# EAGLE board Battery Buddy V1 Board (NO STORAGE) (EAGLE 9.7.0)
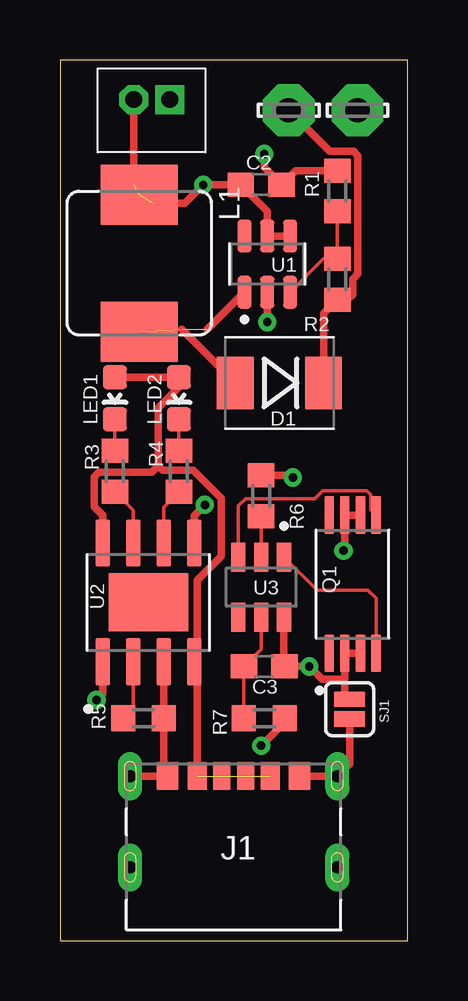
[diagram p0: board, top side]
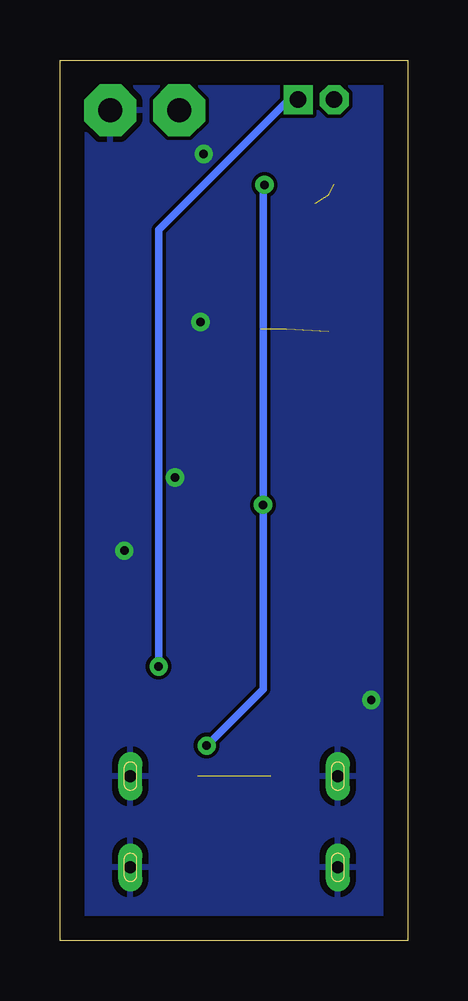
[diagram p1: board, bottom side, seen from below]

Size 14.49 x 36.7 mm. Coordinates in mm from the lower left corner, seen from the top.
Outline: 0,0 14.49,0 14.49,36.7 0,36.7 0,0
Copper layers (1*16): Top 0.035mm / dielectric 1.5mm / Bottom 0.035mm
Design rules "Fusion Electronics Design Rules": minimum track width 6mil, minimum drill 0.35mm, track to track 6mil, track to pad 6mil, pad to pad 6mil, via to via 6mil, smd to smd 6mil, copper to edge 40mil, drill to drill 6mil, minimum pad ring 10mil, minimum via ring 8mil, stop-mask expansion 4mil, vias tented up to drill 9999mil, thermal gap 10mil
Net classes: 1 POWER: width 0.305 mm

## Footprints (pad centres in the part's own frame; a part is rotated, then mirrored left to right if it is on the bottom)
C0603 = smd 1.1 x 1: 1 -0.85,0; 2 0.85,0
DO-214AA = smd 1.524 x 2.184: A 1.841,0; C -1.841,0
CUI_UJC-HP-3-SMT-TR = smd 0.7 x 1.15: A5 -0.5,0.005; B5 0.5,0.005 | smd 0.8 x 1.15: A9 1.52,0.005; B9 -1.52,0.005 | smd 0.9 x 1.15: A12 2.75,0.005; B12 -2.75,0.005 | drill 0.5 pad 1 long: S1 -4.32,0; S2 4.32,0; S3 -4.32,-3.8; S4 4.32,-3.8
INDUCTOR_L0630 = smd 2.5 x 3.2: 1 -2.85,0; 2 2.85,0
0603-GREEN = smd 1 x 1: A 0,-0.877; C 0,0.877
0603-RED = smd 1 x 1: A 0,-0.877; C 0,0.877
LSP10 = drill 1.016 pad 2.159 octagon: MP 0,0
SOP65P640X120-8N = smd 1.56 x 0.4: 1 -2.88,0.975; 2 -2.88,0.325; 3 -2.88,-0.325; 4 -2.88,-0.975; 5 2.88,-0.975; 6 2.88,-0.325; 7 2.88,0.325; 8 2.88,0.975
R0603 = smd 1 x 1.1: 1 -0.85,0; 2 0.85,0
SJ_2S = smd 0.635 x 1.27: 1 -0.412,0; 2 0.412,0
SOT95P280X145-6N = smd 1.37 x 0.59: 1 -1.17,0.95; 2 -1.17,0; 3 -1.17,-0.95; 4 1.17,-0.95; 5 1.17,0; 6 1.17,0.95
SOP127P600X175-9N = smd 1.97 x 0.6: 1 -2.475,1.905; 2 -2.475,0.635; 3 -2.475,-0.635; 4 -2.475,-1.905; 5 2.475,-1.905; 6 2.475,-0.635; 7 2.475,0.635; 8 2.475,1.905 | smd 2.413 x 3.302: 9 0,0
SOT95P280X145-6N' = smd 1.21 x 0.59: 1 -1.255,0.95; 2 -1.255,0; 3 -1.255,-0.95; 4 1.255,-0.95; 5 1.255,0; 6 1.255,0.95
JST-ZH-2P = drill 0.7 square: P$1 0,0 | drill 0.7 octagon: P$2 1.5,0

## Placement (x,y rotation side)
C2  [C0603]  8.38,31.5 0 top
C3  100n  [C0603]  8.51,11.43 180 top
D1  [DO-214AA]  9.14,23.24 180 top
J1  USB-C-SMT-TR  [CUI_UJC-HP-3-SMT-TR]  7.24,6.86 0 top
L1  [INDUCTOR_L0630]  3.3,28.24 270 top
LED1  LED-GREEN0603  [0603-GREEN]  2.29,22.61 180 top
LED2  LED-RED0603  [0603-RED]  4.95,22.61 180 top
LSP3  LSP10  [LSP10]  12.4,34.6 0 top
LSP4  LSP10  [LSP10]  9.53,34.6 0 top
Q1  FS8205A  [SOP65P640X120-8N]  12.19,14.86 90 top
R1  100k  [R0603]  11.56,31.24 270 top
R2  900k  [R0603]  11.56,27.56 270 top
R3  1k  [R0603]  2.29,19.56 270 top
R4  1k  [R0603]  4.95,19.56 270 top
R5  1.2k  [R0603]  3.48,9.27 0 top
R6  1k  [R0603]  8.38,18.54 90 top
R7  100  [R0603]  8.51,9.27 180 top
SJ1  SOLDERJUMPERNC  [SJ_2S]  12.06,9.65 90 top
U1  MT3608  [SOT95P280X145-6N]  8.64,28.19 90 top
U2  TP4056  [SOP127P600X175-9N]  3.68,14.1 90 top
U3  DW01A  [SOT95P280X145-6N']  8.38,14.73 270 top
U$1  JST-ZH-2P  [JST-ZH-2P]  4.57,35.05 180 top

## Library data of the parts
C2 C3 = rcl; SPICEPREFIX: C
D1 L1 LED1 LED2 = BeagleBone_Blue_R3
J1 = USB-C-SMT-TR; AVAILABILITY: In Stock; CHECK_PRICES: https://www.snapeda.com/parts/UJC-HP-3-SMT-TR/Same+Sky/view-part/?ref=eda; DESCRIPTION: Type C, 20 Vdc, 3 A, Right Angle, Surface Mount, Black Insulator, Power-Only USB Receptacle; MF: Same Sky; MP: UJC-HP-3-SMT-TR; PACKAGE: Package; PRICE: None; SNAPEDA_LINK: https://www.snapeda.com/parts/UJC-HP-3-SMT-TR/Same+Sky/view-part/?ref=snap
LSP3 LSP4 = solpad
Q1 = FS8205A; AVAILABILITY: In Stock; CHECK_PRICES: https://www.snapeda.com/parts/FS8205A/Fortune+Semiconductor/view-part/?ref=eda; MF: Fortune Semiconductor; MP: FS8205A; PACKAGE: Package; PRICE: None; SNAPEDA_LINK: https://www.snapeda.com/parts/FS8205A/Fortune+Semiconductor/view-part/?ref=snap
R1-R7 = rcl; SPICEPREFIX: R
SJ1 = SparkFun-Retired
U1 = MT3608; AVAILABILITY: Not in stock; CHECK_PRICES: https://www.snapeda.com/parts/MT3608/Aerosemi+Technology+Co.%252C+Ltd/view-part/?ref=eda; DESCRIPTION: High Efficiency 1.2MHz 2A Step Up Converter; MF: Aerosemi Technology Co., Ltd; MP: MT3608; PACKAGE: Package; PRICE: None; SNAPEDA_LINK: https://www.snapeda.com/parts/MT3608/Aerosemi+Technology+Co.%252C+Ltd/view-part/?ref=snap
U2 = TP4056; AVAILABILITY: Not in stock; CHECK_PRICES: https://www.snapeda.com/parts/TP4056/NanJing+Top+Power+ASIC+Corp./view-part/?ref=eda; DESCRIPTION: Complete single cell Li-Ion battery with a constant current / constant voltage linear charger; MF: NanJing Top Power ASIC Corp.; MP: TP4056; PACKAGE: Package; PRICE: None; SNAPEDA_LINK: https://www.snapeda.com/parts/TP4056/NanJing+Top+Power+ASIC+Corp./view-part/?ref=snap
U3 = DW01A; AVAILABILITY: Not in stock; CHECK_PRICES: https://www.snapeda.com/parts/DW01A/Fortune+Semiconductor/view-part/?ref=eda; DESCRIPTION: One Cell Lithium-ion/Polymer Battery Protection IC; MF: Fortune Semiconductor; MP: DW01A; PACKAGE: SOT-23-6 Fortune Semiconductor; PRICE: None; SNAPEDA_LINK: https://www.snapeda.com/parts/DW01A/Fortune+Semiconductor/view-part/?ref=snap
U$1 = JST-ZH

## Nets
+6V [POWER]: D1.C LSP4.MP R2.2
BATN [POWER]: C3.1 Q1.2 Q1.3 SJ1.2 U3.6 U$1.P$1
BATP [POWER]: C2.1 L1.1 R7.1 U1.4 U1.5 U2.5 U$1.P$2
CHRG: R3.2 U2.7
GND [POWER]: C2.2 J1.A12 J1.B12 J1.S1 J1.S2 J1.S3 J1.S4 LSP3.MP Q1.6 Q1.7 R1.1 R5.2 R6.2 SJ1.1 U1.2 U2.1 U2.3
N$1: LED1.C R3.1
N$2: LED2.C R4.1
N$3: R5.1 U2.2
N$4: R6.1 U3.2
N$5: Q1.4 U3.1
N$6: Q1.5 U3.3
N$7: C3.2 R7.2 U3.5
N$8 [POWER]: D1.A L1.2 U1.1
N$9: R1.2 R2.1 U1.3
STDBY: R4.2 U2.6
USB [POWER]: J1.A9 J1.B9 LED1.A LED2.A U2.4 U2.8

## Tracks (layer width: path | path; a pad name or v marks a point on that pad's centre or on a via)
+6V
  Top 0.305: 11.56,26.93 R2.2 | LSP4.MP 11.23,32.9 12.23,32.9 12.41,32.72 12.41,27.78 12.19,27.56 12.19,26.92 11.98,26.71 R2.2 | D1.C 10.99,26.14 R2.2
BATN  (via drill 0.35)
  Top 0.305: Q1.3 Q1.2 11.87,10.79 | SJ1.2 11.87,10.26 11.87,10.79 | U3.6 9.33,11.46 C3.1 v10.38,11.43 10.92,10.89 11.77,10.89 11.87,10.79
  Bottom 0.305: v10.38,11.43 10.38,29.62 4.95,35.05 U$1.P$1
BATP  (via drill 0.35)  (2 unrouted)
  Top 0.305: U1.4 U1.5 8.64,30.39 C2.1 v5.97,31.5 5.21,30.73 3.87,30.73 | U2.5 5.59,17.71 v6.03,18.16 | v8.38,8.13 9.36,9.11 R7.1 | 3.07,31.53 U$1.P$2
  Bottom 0.305: v8.38,8.13 6.03,10.48 v6.03,18.16 6.03,31.5 v5.97,31.5
CHRG
  Top 0.152: R3.2 3.05,17.95 U2.7
GND  (via drill 0.35)
  Top 0.305: J1.S1 J1.B12 4.33,7.02 R5.2 4.32,9.28 U2.3 | J1.A12 J1.S2 | J1.S2 | U2.1 1.78,10.29 v1.52,10.03 | v8.51,32.78 8.51,32.22 C2.2 9.83,32.09 R1.1 | Q1.6 Q1.7 11.87,16.31 v11.81,16.26 | SJ1.1 12.06,7.38 J1.S2 | R6.2 9.61,19.39 v9.7,19.3 | U1.2 v8.64,25.78
  pour Bottom: -2.35,38.91 -2.34,38.88 -2.34,-2.38 -2,-2.72 16.94,-2.72 16.94,39.04 -2.38,39.04 -2.43,38.99
N$1
  Top 0.152: LED1.C R3.1
N$2
  Top 0.152: R4.1 LED2.C
N$3
  Top 0.152: U2.2 3.05,9.69 R5.1
N$4
  Top 0.152: R6.1 U3.2
N$5
  Top 0.152: U3.1 10.71,14.61 12.83,14.61 13.17,14.27 Q1.4
N$6
  Top 0.152: U3.3 7.43,18.11 7.74,18.42 10.62,18.42 10.95,18.75 12.78,18.75 12.95,18.58 12.95,17.96 Q1.5
N$7
  Top 0.152: U3.5 8.38,12.15 C3.2 R7.2
N$8  (2 unrouted)
  Top 0.305: D1.A 5.07,25.47 | 6.13,25.47 U1.1
N$9
  Top 0.152: U1.3 10.97,28.41 R2.1 R1.2
STDBY
  Top 0.152: U2.6 4.32,18.07 R4.2
USB  (1 unrouted)
  Top 0.305: J1.B9 5.72,11.49 | 5.72,11.49 U2.4 | LED1.A LED2.A 4.95,23.07 4.1,22.22 4.1,19.78 | 4.1,19.78 4.28,19.6 5.56,19.6 6.72,18.44 6.72,16.03 5.72,15.03 5.72,11.49 | 4.1,19.78 3.83,19.51 1.61,19.51 1.43,19.33 1.43,18.08 1.78,17.73 U2.8